# Altium PCB PCB_FinalVersion.PcbDoc
Units mm, origin at the board's own origin, x right, y up, seen from the top; angles counter-clockwise.
Board outline 269.9 x 119.9 mm, 2 copper layers (Top Layer, Bottom Layer); 58 components, 78 nets, 213 pads, 10 vias.
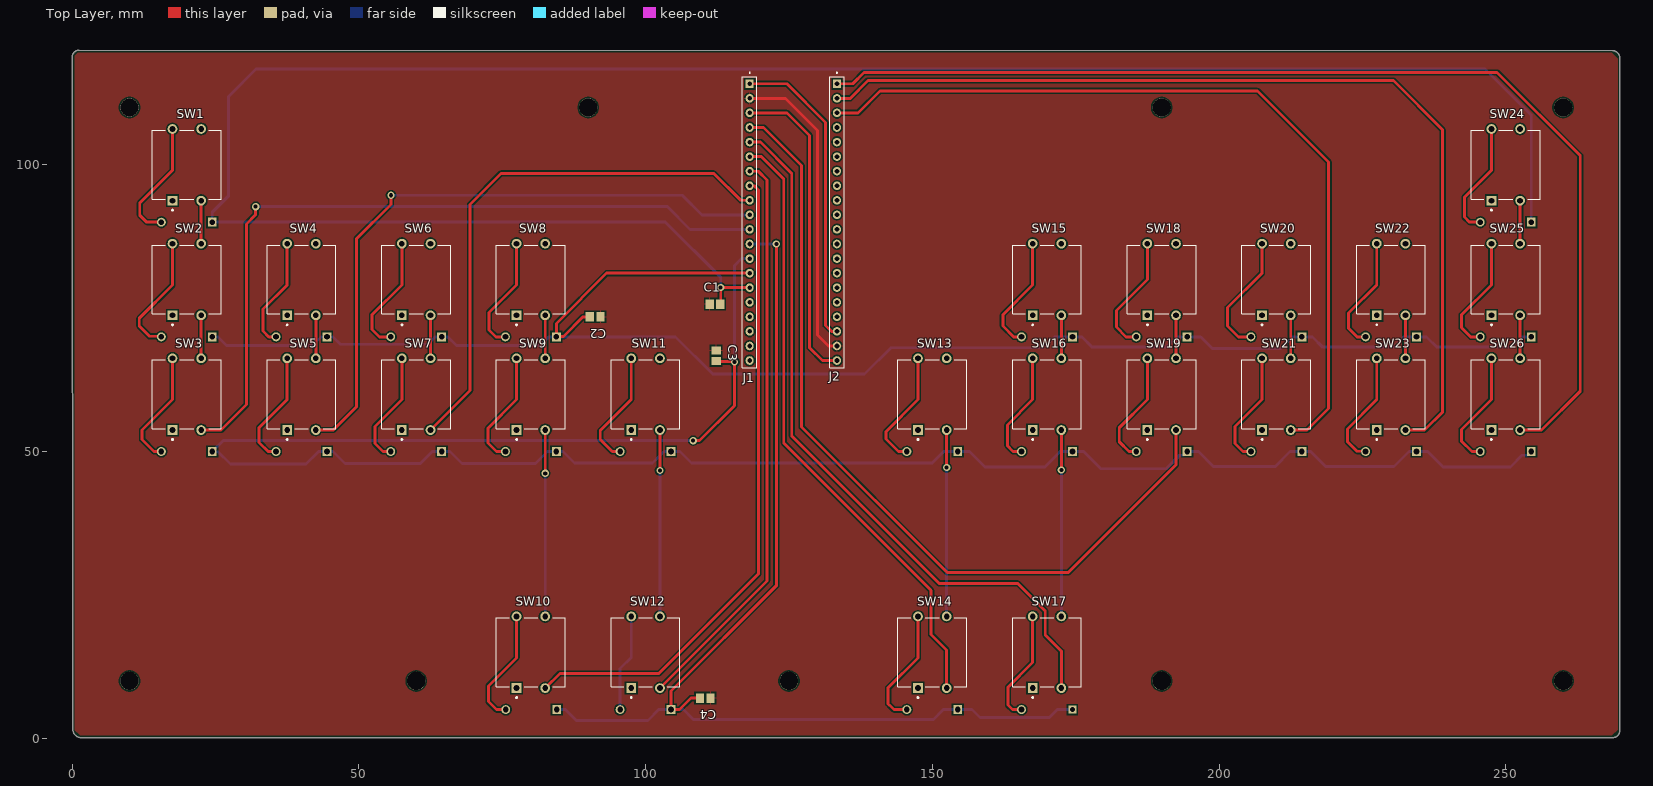
[diagram p0: Top Layer view]
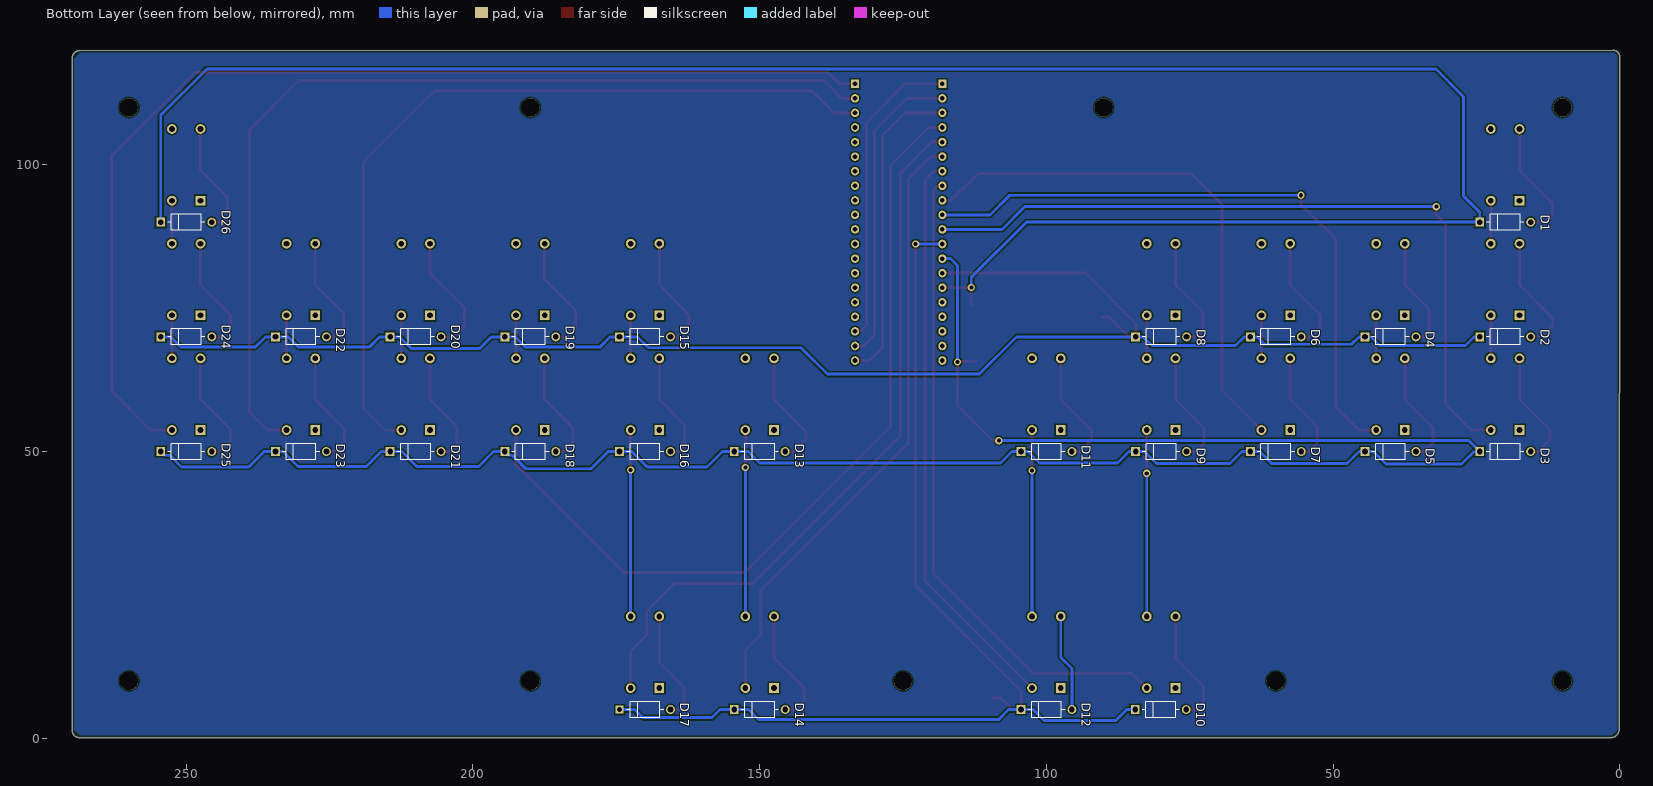
[diagram p1: Bottom Layer view, seen from below]
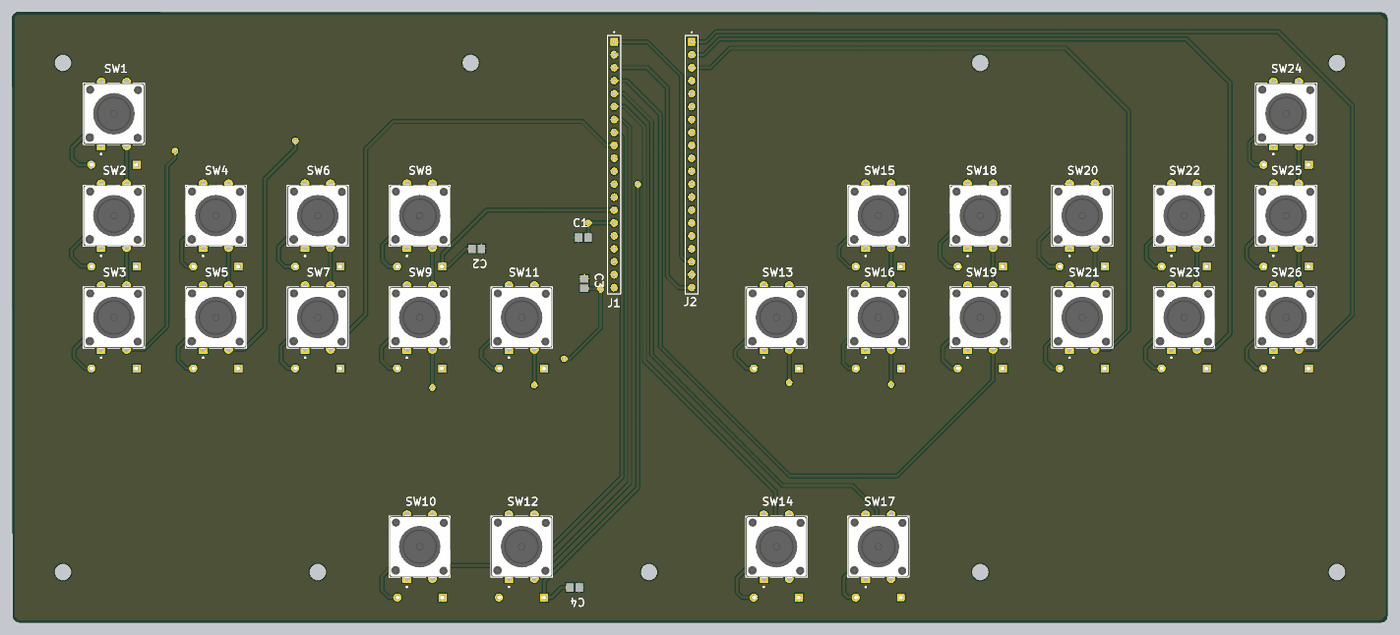
[diagram p2: 3D render of the assembled board from above, using the file's embedded part models]
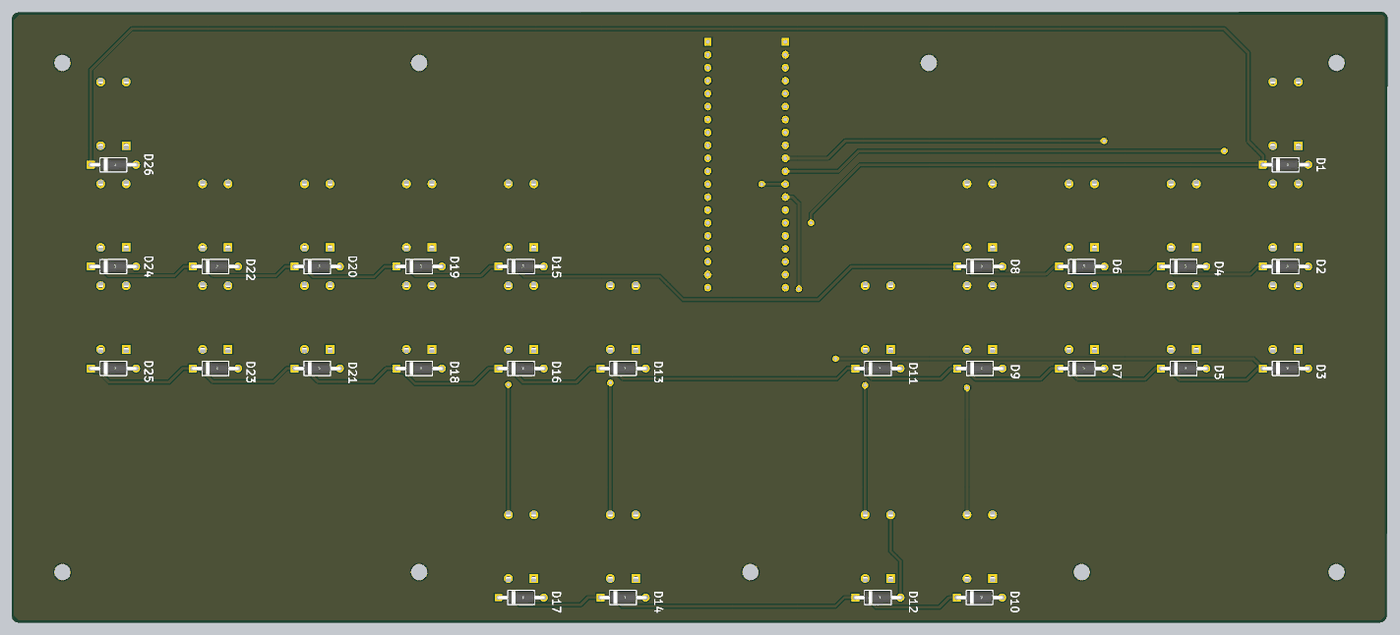
[diagram p3: 3D render of the assembled board from below, using the file's embedded part models]

## Layer stack, top to bottom
Top Solder: solder mask 0.0102, Solder Resist, Dk 3.5
Top Layer: signal copper 0.0356
Dielectric 1: dielectric 0.32, FR-4, Dk 4.8
Bottom Layer: signal copper 0.0356
Bottom Solder: solder mask 0.0102, Solder Resist, Dk 3.5

## Board outline
0.129,1.541 ccw(c1.57,1.541) 1.57,0.1 5,0.1 268.63,0.1 ccw(c268.63,1.37) 269.9,1.37 269.9,118.63 ccw(c268.63,118.63) 268.63,119.9 1.217,120 ccw(c1.217,118.783) 0,118.783

## Design rules (kind name [scope] priority, off if disabled: settings)
Clearance [All] p1: gap=0.254 ignorepadtopadclearanceinfootprint=FALSE except(0: Arc-Hole Track-Hole SMDPad-Hole THPad-Hole Via-Hole Fill-Hole Poly-Hole Region-Hole Text-Hole)
PolygonConnect [All] p1: connectstyle=Relief reliefconductorwidth=0.254 reliefentries=4 polygonreliefangle="90 Angle" airgapwidth=0.254
RoutingVias [All] p1: holewidth=0.711 width=1.27 viastyle="Through Hole" minholewidth=0.711 minwidth=1.27 maxholewidth=0.711 maxwidth=1.27
SolderMaskExpansion [All] p1: expansion=0.102 istentingtop=FALSE
Width [All] p1: maxlimit=0.5 minlimit=0.254 preferedwidth=0.3
30 further rules are at their usual default settings.

## Classes and differential pairs
component class Sheet1: * A B C1 C2 C3 C4 D D1 D2 D3 D4 D5 D6 D7 D8 D9 D10 D11 D12 D13 D14 D15 D16 D17 D18 D19 D20 D21 D22 D23 D24 D25 D26 E F G H J1 J2 K L O P R S "Special 1" "Special 2" T U W Z

## Components (designator, comment, footprint, x,y, rotation, side; value= is the part's Value field where it differs from the comment)
C1 "TACR107M003XTA" CAPC2014X150X70ML20 112.1,75.7 r0 top
C2 "TACR107M003XTA" CAPC2014X150X70ML20 91.2,73.5 r180 top
C3 "TACR107M003XTA" CAPC2014X150X70ML20 112.3,66.7 r270 top
C4 "TACR107M003XTA" CAPC2014X150X70ML20 110.4,7 r180 top
D1 "1N4007" FP-1N4007-MFG#1 20,90 r180 bottom value=15pF
D2 "1N4007" FP-1N4007-MFG#1 20,70 r180 bottom value=15pF
D3 "1N4007" FP-1N4007-MFG#1 20,50 r180 bottom value=15pF
D4 "1N4007" FP-1N4007-MFG#1 40,70 r180 bottom value=15pF
D5 "1N4007" FP-1N4007-MFG#1 40,50 r180 bottom value=15pF
D6 "1N4007" FP-1N4007-MFG#1 60,70 r180 bottom value=15pF
D7 "1N4007" FP-1N4007-MFG#1 60,50 r180 bottom value=15pF
D8 "1N4007" FP-1N4007-MFG#1 80,70 r180 bottom value=15pF
D9 "1N4007" FP-1N4007-MFG#1 80,50 r180 bottom value=15pF
D10 "1N4007" FP-1N4007-MFG#1 80.061,5 r180 bottom value=15pF
D11 "1N4007" FP-1N4007-MFG#1 100,50 r180 bottom value=15pF
D12 "1N4007" FP-1N4007-MFG#1 100,5 r180 bottom value=15pF
D13 "1N4007" FP-1N4007-MFG#1 150,50 r180 bottom value=15pF
D14 "1N4007" FP-1N4007-MFG#1 150,5 r180 bottom value=15pF
D15 "1N4007" FP-1N4007-MFG#1 170,70 r180 bottom value=15pF
D16 "1N4007" FP-1N4007-MFG#1 170,50 r180 bottom value=15pF
D17 "1N4007" FP-1N4007-MFG#2 170,5 r180 bottom value=15pF
D18 "1N4007" FP-1N4007-MFG#1 190,50 r180 bottom value=15pF
D19 "1N4007" FP-1N4007-MFG#1 190,70 r180 bottom value=15pF
D20 "1N4007" FP-1N4007-MFG#1 210,70 r180 bottom value=15pF
D21 "1N4007" FP-1N4007-MFG#1 210,50 r180 bottom value=15pF
D22 "1N4007" FP-1N4007-MFG#1 230,70 r180 bottom value=15pF
D23 "1N4007" FP-1N4007-MFG#1 230,50 r180 bottom value=15pF
D24 "1N4007" FP-1N4007-MFG#1 250,70 r180 bottom value=15pF
D25 "1N4007" FP-1N4007-MFG#1 250,50 r180 bottom value=15pF
D26 "1N4007" FP-1N4007-MFG#1 250,90 r180 bottom value=15pF
J1 "TS-120-T-AA" SAMTEC_TS-120-T-AA 118.156,90 r270 top
J2 "TS-120-T-AA" SAMTEC_TS-120-T-AA 133.376,90 r270 top
SW1 "MJTP1212A" FP-MJTP1212A-MFG 20,100 r90 top
SW2 "MJTP1212A" FP-MJTP1212A-MFG 20,80 r90 top
SW3 "MJTP1212A" FP-MJTP1212A-MFG 20,60 r90 top
SW4 "MJTP1212A" FP-MJTP1212A-MFG 40,80 r90 top
SW5 "MJTP1212A" FP-MJTP1212A-MFG 40,60 r90 top
SW6 "MJTP1212A" FP-MJTP1212A-MFG 60,80 r90 top
SW7 "MJTP1212A" FP-MJTP1212A-MFG 60,60 r90 top
SW8 "MJTP1212A" FP-MJTP1212A-MFG 80,80 r90 top
SW9 "MJTP1212A" FP-MJTP1212A-MFG 80,60 r90 top
SW10 "MJTP1212A" FP-MJTP1212A-MFG 80,15 r90 top
SW11 "MJTP1212A" FP-MJTP1212A-MFG 100,60 r90 top
SW12 "MJTP1212A" FP-MJTP1212A-MFG 100,15 r90 top
SW13 "MJTP1212A" FP-MJTP1212A-MFG 150,60 r90 top
SW14 "MJTP1212A" FP-MJTP1212A-MFG 150,15 r90 top
SW15 "MJTP1212A" FP-MJTP1212A-MFG 170,80 r90 top
SW16 "MJTP1212A" FP-MJTP1212A-MFG 170,60 r90 top
SW17 "MJTP1212A" FP-MJTP1212A-MFG 170,15 r90 top
SW18 "MJTP1212A" FP-MJTP1212A-MFG 190,80 r90 top
SW19 "MJTP1212A" FP-MJTP1212A-MFG 190,60 r90 top
SW20 "MJTP1212A" FP-MJTP1212A-MFG 210,80 r90 top
SW21 "MJTP1212A" FP-MJTP1212A-MFG 210,60 r90 top
SW22 "MJTP1212A" FP-MJTP1212A-MFG 230,80 r90 top
SW23 "MJTP1212A" FP-MJTP1212A-MFG 230,60 r90 top
SW24 "MJTP1212A" FP-MJTP1212A-MFG 250,100 r90 top
SW25 "MJTP1212A" FP-MJTP1212A-MFG 250,80 r90 top
SW26 "MJTP1212A" FP-MJTP1212A-MFG 250,60 r90 top

## Footprints (in the part's own frame and the unit in brackets; to place one, negate y for a bottom-side part, rotate by r counter-clockwise, add the part's x,y. Pads: shape width x height; smd on the part's side, far side on the other; paste and mask are expansions set on the pad)
CAPC2014X150X70ML20 [mm] "Chip Capacitor, 2-Leads, Body 2.00x1.35mm, IPC Low Density"
  rect 1.45x1.65 smd: 1(-0.925,0) 2(0.925,0)
  body extent -1.1,-0.77 1.1,0.77, height 1.5
FP-1N4007-MFG#1 [mm]
  rect 1.55x1.55 hole 1 paste-2539.97 mask+0: 1(-4.44,0)
  round 1.55 hole 1 paste-2539.97 mask+0: 2(4.44,0)
  silkscreen extent -3.27,-1.4 3.27,1.4, body extent -4.83,-1.29 4.83,1.29, height 2.6
FP-1N4007-MFG#2 [mm]
  rect 1.4x1.4 hole 0.9 paste-2539.97 mask+0: 1(-4.44,0)
  round 1.55 hole 1 paste-2539.97 mask+0: 2(4.44,0)
  silkscreen extent -3.27,-1.4 3.27,1.4, body extent -4.83,-1.29 4.83,1.29, height 2.6
FP-MJTP1212A-MFG [mm]
  rect 1.7x1.7 hole 1 paste-2539.97 mask+0: 1(-6.25,2.5)
  round 1.7 hole 1 paste-2539.97 mask+0: 2(6.25,2.5) 3(-6.25,-2.5) 4(6.25,-2.5)
  silkscreen extent -8.02,-6 6,6, body extent -7.27,-6.1 7.27,6.1, height 0.25
SAMTEC_TS-120-T-AA [mm]
  rect 1.5x1.4 hole 0.8: 01(-24.13,0)
  oval 1.5x1.4 hole 0.8: 02(-21.59,0) 03(-19.05,0) 04(-16.51,0) 05(-13.97,0) 06(-11.43,0) 07(-8.89,0) 08(-6.35,0) 09(-3.81,0) 10(-1.27,0) 11(1.27,0) 12(3.81,0) 13(6.35,0) 14(8.89,0) 15(11.43,0) 16(13.97,0) 17(16.51,0) 18(19.05,0) 19(21.59,0) 20(24.13,0)
  silkscreen extent -26.15,-1.27 25.4,1.27

## Part data
C1 C2 C3 C4: library part CMP-2007-00028-1, Manufacturer="AVX Interconnect / Elco", Part Number=TACR107M003XTA
D1 D2 D3 D4 D5 D6 D7 D8 D9 D10 D11 D12 D13 D14 D15 D16 D17 D18 D19 D20 D21 D22 D23 D24 D25 D26: library part CMP-123542-000001-1, "Rectifier diode 1000 V 1 A DO-41, ,", Capacitance=15pF, Forward Current=1A, Manufacturer=Diotec, Max Junction Temp=+175°C, Max Repetitive Reverse Voltage=1000V, Max Surge Forward Current=27A, Peak Reverse Current=5uA, Temperature="-50°C to +175°C", Temperature Range Low=-50°C, Automotive=No, Category=Diode, ComponentLink2Description=Datasheet, ComponentLink2URL=https://datasheet.octopart.com/1N4007-Diotec-datasheet-62346875.pdf, Device Class L1="Discrete Semiconductors", Device Class L2=Diodes, Device Class L3="Rectifier Diodes", Height=2.8mm, Ipc Land Pattern Name=DIOAD888W100L520D280, Lead Free=Yes, Manufacturer Part Number=1N4007, Octopart=https://octopart.com/1n4007-diotec-4040411, Package=1N4007, Reverse Voltage=1000V, RoHS=TRUE, Temperature Range High=+175°C
J1 J2: "Headers & Wire Housings .100 Single Row Screw Machine Terminal Strip", Package=None, Availability="In Stock", Check_prices=https://www.snapeda.com/parts/TS-120-T-AA/Samtec/view-part/?ref=eda, MF=Samtec, MP=TS-120-T-AA, Price=None, Purchase-URL=https://pricing.snapeda.com/search?q=TS-120-T-AA&ref=eda, SnapEDA_Link=https://www.snapeda.com/parts/TS-120-T-AA/Samtec/view-part/?ref=snap
SW1 SW2 SW3 SW4 SW5 SW6 SW7 SW8 SW9 SW10 SW11 SW12 SW13 SW14 SW15 SW16 SW17 SW18 SW19 SW20 SW21 SW22 SW23 SW24 SW25 SW26: library part CMP-47024-000003-1, "SWITCH TACTILE SPST-NO 0.05A 12V", Contact Resistance=100mR, Current Rating=50mA, Max Operating Temperature=70°C, Max Voltage Rating (DC)=12V, Min Operating Temperature=-20°C, Operating Force=160gf, Package Quantity=100, Actuator Length=3.5mm, Actuator Material=Polyoxymethylene, Actuator Type=Standard, Contact Material=Bronze, Contact Plating=Silver, Electrical Life=100000Cycles, Illumination Type=Non-Illuminated, Mechanical Life=100000Cycles, Mount="Through Hole", Orientation=Straight, Packaging=Bulk, REACH SVHC="No SVHC", Switch Function=Off-Mom, Switch Travel=0.3mm, Termination="PC Pin", Throw Configuration=SPST, Voltage Rating (DC)=12V

## Free pads (board coordinates)
  round 3.2 hole 3.2: 4(10,10) 4(10,110) 4(60,10) 4(90,110) 4(125,10) 4(190,10) 4(190,110) 4(260,10) 4(260,110)

## Via types
v1: diameter 1.27, hole 0.711, Top Layer to Bottom Layer, 10 vias

## Nets (pads, with @x,y where several pads share a name; then routed paths per layer and width w, separated by ;. In a path a pad name is that pad's centre, name@x,y a point inside that pad or via, vN(x,y) a via of type N, cw(c..) or ccw(c..) an arc to the next point about the centre after c; other vN are vias at no path point)
3.3V: J1.03 J2.20 | length 54.8
  Top Layer w0.5: J1.03 124.65,109.05 128.6,105.1 128.6,68.1 130.83,65.87 J2.20
5V: J1.01 J2.18 | length 53.8
  Top Layer w0.5: J1.01 124.67,114.13 131.4,107.4 131.4,72 132.45,70.95 J2.18
A8: J2.05
A9: J2.06
A10: J2.07
A11: J2.08
A12: J2.09
A15: J2.10
B3: J2.11
B4: J2.12
B5: J2.13
B6: J2.14
B7: J2.15
B8: J2.16
B9: J2.17
B15: J2.04
C13: J1.19
C14: J1.18
C15: J1.17
Column1: J1.11 SW3.3 | length 132.7
  Top Layer w0.5: SW3.3 25.95,53.75 30.4,58.2 30.4,89.7 32,91.3 v1(32,92.7)
  Bottom Layer w0.5: v1(32,92.7) 103.8,92.7 107.77,88.73 J1.11
Column2: J1.10 SW5.3 | length 112.1
  Top Layer w0.5: SW5.3 45.55,53.75 49.6,57.8 49.6,87.1 55.6,93.1 v1(55.6,94.7)
  Bottom Layer w0.5: v1(55.6,94.7) 106.4,94.7 109.83,91.27 J1.10
Column3: J1.09 SW7.3 | length 95.1
  Top Layer w0.5: SW7.3 69.4,60.65 69.4,93.1 74.8,98.5 111.9,98.5 116.59,93.81 J1.09
Column4: J1.08 SW10.3 | length 114.2
  Top Layer w0.5: SW10.3 85.05,11.3 102.3,11.3 119.7,28.7 119.7,95.6 118.95,96.35 J1.08
Column5: J1.07 SW12.3 | length 100
  Top Layer w0.5: SW12.3 121.2,27.45 121.2,97.33 119.64,98.89 J1.07
Column6: J1.06 SW14.3 | length 108.1
  Top Layer w0.5: J1.06 120.17,101.43 124.1,97.5 124.1,51.5 149.8,25.8 149.8,18.091 152.5,15.391 SW14.3
Column7: J1.05 SW17.3 | length 126.9
  Top Layer w0.5: J1.05 120.03,103.97 125.5,98.5 125.5,52.7 151.2,27 164.9,27 169.7,22.2 169.7,18 172.5,15.2 SW17.3
Column8: J1.04 SW19.3 | length 147
  Top Layer w0.5: J1.04 120.59,106.51 127.2,99.9 127.2,54.3 152.6,28.9 173.7,28.9 192.5,47.7 SW19.3
Column9: J2.03 SW21.3 | length 143.6
  Top Layer w0.5: J2.03 137.05,109.05 140.9,112.9 206.7,112.9 219.1,100.5 219.1,57.5 215.35,53.75 SW21.3
Column10: J2.02 SW23.3 | length 167.5
  Top Layer w0.5: J2.02 135.69,111.59 138.8,114.7 230.4,114.7 239,106.1 239,56.9 235.85,53.75 SW23.3
Column11: J2.01 SW26.3 | length 190.8
  Top Layer w0.5: J2.01 136.13,114.13 138.1,116.1 248.5,116.1 263,101.6 263,60.5 256.25,53.75 SW26.3
GND: C1.1 C2.1 C3.1 C4.1 J1.02 J2.19 | length 54
  Top Layer w0.5: J1.02 124.41,111.59 130,106 130,70.3 131.89,68.41 J2.19
NetD1_2: D1.2 SW1.2 | length 21.7
  Top Layer w0.5: D1.2 13,90 11.8,91.2 11.8,93.354 17.5,99.054 SW1.2
NetD2_2: D2.2 SW2.2 | length 21.4
  Top Layer w0.5: D2.2 15.462,70.098 13.502,70.098 11.7,71.9 11.7,73.254 17.5,79.054 SW2.2
NetD3_2: D3.2 SW3.2 | length 20.6
  Top Layer w0.5: D3.2 14.3,50 12.2,52.1 12.2,53.754 17.5,59.054 SW3.2
NetD4_2: D4.2 SW4.2 | length 19.7
  Top Layer w0.5: D4.2 34.3,70 33.3,71 33.3,74.854 37.5,79.054 SW4.2
NetD5_2: D5.2 SW5.2 | length 20.3
  Top Layer w0.5: D5.2 34.2,50 32.6,51.6 32.6,54.154 37.5,59.054 SW5.2
NetD6_2: D6.2 SW6.2 | length 20.9
  Top Layer w0.5: D6.2 53.6,70 52.3,71.3 52.3,73.854 57.5,79.054 SW6.2
NetD7_2: D7.2 SW7.2 | length 20.1
  Top Layer w0.5: D7.2 54.2,50 52.8,51.4 52.8,54.354 57.5,59.054 SW7.2
NetD8_2: D8.2 SW8.2 | length 20.4
  Top Layer w0.5: D8.2 73.9,70 72.7,71.2 72.7,74.254 77.5,79.054 SW8.2
NetD9_2: D9.2 SW9.2 | length 20.5
  Top Layer w0.5: D9.2 74,50 72.5,51.5 72.5,54.054 77.5,59.054 SW9.2
NetD10_2: D10.2 SW10.2 | length 20.5
  Top Layer w0.5: D10.2 74,5 72.6,6.4 72.6,9.124 77.5,14.024 SW10.2
NetD11_2: D11.2 SW11.2 | length 20.7
  Top Layer w0.5: D11.2 94.2,50 92.1,52.1 92.1,53.654 97.5,59.054 SW11.2
NetD12_2: D12.2 SW12.2 | length 17.1
  Bottom Layer w0.5: D12.2 95.56,12.16 97.5,14.1 SW12.2
NetD13_2: D13.2 SW13.2 | length 20.9
  Top Layer w0.5: D13.2 144.1,50 141.9,52.2 141.9,53.454 147.5,59.054 SW13.2
NetD14_2: D14.2 SW14.2 | length 21.1
  Top Layer w0.5: D14.2 143.3,5 142.6,5.7 142.593,5.7 142.3,5.993 142.3,8.8 147.5,14 SW14.2
NetD15_2: D15.2 SW15.2 | length 20.6
  Top Layer w0.5: D15.2 164.2,70 162.3,71.9 162.3,73.854 167.5,79.054 SW15.2
NetD16_2: D16.2 SW16.2 | length 19.9
  Top Layer w0.5: D16.2 164.1,50 163.1,51 163.1,54.654 167.5,59.054 SW16.2
NetD17_2: D17.2 SW17.2 | length 19.9
  Top Layer w0.5: D17.2 164,5 163.2,5.8 163.2,8.9 167.5,13.2 SW17.2
NetD18_2: D18.2 SW19.2 | length 20.2
  Top Layer w0.5: D18.2 184.3,50 182.6,51.7 182.6,54.154 187.5,59.054 SW19.2
NetD19_2: D19.2 SW18.2 | length 21
  Top Layer w0.5: D19.2 183.8,70 182.1,71.7 182.1,74.6 187.5,80 SW18.2
NetD20_2: D20.2 SW20.2 | length 21.7
  Top Layer w0.5: D20.2 203.4,70 201.5,71.9 201.5,75.1 207.5,81.1 SW20.2
NetD21_2: D21.2 SW21.2 | length 20.1
  Top Layer w0.5: D21.2 204.2,50 202.8,51.4 202.8,54.354 207.5,59.054 SW21.2
NetD22_2: D22.2 SW22.2 | length 20.4
  Top Layer w0.5: D22.2 224.1,70 222.6,71.5 222.6,74.154 227.5,79.054 SW22.2
NetD23_2: D23.2 SW23.2 | length 20.5
  Top Layer w0.5: D23.2 225.512,50.048 224.052,50.048 222.4,51.7 222.4,53.954 227.5,59.054 SW23.2
NetD24_2: D24.2 SW25.2 | length 20.7
  Top Layer w0.5: D24.2 243.9,70 242.3,71.6 242.3,73.854 247.5,79.054 SW25.2
NetD25_2: D25.2 SW26.2 | length 20.6
  Top Layer w0.5: D25.2 244.1,50 242.3,51.8 242.3,53.854 247.5,59.054 SW26.2
NetD26_2: D26.2 SW24.2 | length 20.4
  Top Layer w0.5: D26.2 243.7,90 242.8,90.9 242.8,94.354 247.5,99.054 SW24.2
NetSW1_3: SW1.3 SW2.4 | length 7.5
  Top Layer w0.5: SW2.4 SW1.3
NetSW2_3: SW2.3 SW3.4 | length 7.5
  Top Layer w0.5: SW3.4 SW2.3
NetSW4_3: SW4.3 SW5.4 | length 7.5
  Top Layer w0.5: SW5.4 SW4.3
NetSW6_3: SW6.3 SW7.4 | length 7.5
  Top Layer w0.5: SW7.4 SW6.3
NetSW8_3: SW8.3 SW9.4 | length 7.5
  Top Layer w0.5: SW9.4 SW8.3
NetSW9_3: SW9.3 SW10.4 | length 32.5
  Top Layer w0.5: v1(82.5,46.2) SW9.3
  Bottom Layer w0.5: SW10.4 v1(82.5,46.2)
NetSW11_3: SW11.3 SW12.4 | length 32.5
  Top Layer w0.5: v1(102.5,46.7) SW11.3
  Bottom Layer w0.5: SW12.4 v1(102.5,46.7)
NetSW13_3: SW13.3 SW14.4 | length 32.5
  Top Layer w0.5: v1(152.5,47.2) SW13.3
  Bottom Layer w0.5: SW14.4 v1(152.5,47.2)
NetSW15_3: SW15.3 SW16.4 | length 7.5
  Top Layer w0.5: SW16.4 SW15.3
NetSW16_3: SW16.3 SW17.4 | length 32.5
  Top Layer w0.5: v1(172.5,46.8) SW16.3
  Bottom Layer w0.5: SW17.4 v1(172.5,46.8)
NetSW18_3: SW18.3 SW19.4 | length 7.5
  Top Layer w0.5: SW19.4 SW18.3
NetSW20_3: SW20.3 SW21.4 | length 7.5
  Top Layer w0.5: SW21.4 SW20.3
NetSW22_3: SW22.3 SW23.4 | length 7.5
  Top Layer w0.5: SW23.4 SW22.3
NetSW24_3: SW24.3 SW25.4 | length 7.5
  Top Layer w0.5: SW25.4 SW24.3
NetSW25_3: SW25.3 SW26.4 | length 7.5
  Top Layer w0.5: SW26.4 SW25.3
R: J1.16
Row1: C1.2 D1.1 D26.1 J1.15 | length 376.8
  Top Layer w0.5: C1.2@112.925,75.7 113.1,75.875 v1(113.1,78.6) 113.115,78.585 118.141,78.585 J1.15 ; D26.1 D26.1@254.53,90.09
  Bottom Layer w0.5: v1(113.1,78.6) 113.1,80.4 103.5,90 D1.1 24.44,91.74 27.3,94.6 27.3,111.928 32.072,116.7 246.4,116.7 254.44,108.66 D26.1
Row2: C2.2 D2.1 D4.1 D6.1 D8.1 D15.1 D19.1 D20.1 D22.1 D24.1 J1.14 | length 292.1
  Top Layer w0.5: C2.2 90.268,73.493 89.093,73.493 85.672,70.072 84.512,70.072 D8.1 84.44,72.34 93.21,81.11 J1.14
  Bottom Layer w0.5: D2.1 24.487,69.953 25.447,69.953 26.9,68.5 41.9,68.5 43.4,70 45.5,70 46.8,68.7 62,68.7 63.3,70 65.5,70 67,68.5 81.6,68.5 83.1,70 D8.1 105.2,70 111.7,63.5 138.2,63.5 142.8,68.1 169.4,68.1 171.3,70 D15.1 176.1,70 177.9,68.2 190.8,68.2 192.6,70 D19.1 196.8,70 198.8,68 210.8,68 212.8,70 D20.1 216.3,70 218.1,68.2 230.4,68.2 232.2,70 D22.1 236.2,70 238,68.2 250.9,68.2 252.7,70 D24.1
Row3: C3.2 D3.1 D5.1 D7.1 D9.1 D11.1 D13.1 D16.1 D18.1 D21.1 D23.1 D25.1 J1.13 | length 375.1
  Top Layer w0.5: D3.1@24.39,49.95 D3.1 ; v1(108.3,51.9) 109.4,51.9 115.5,58 v1(115.5,65.6) 115.412,65.688 112.488,65.688 C3.2@112.4,65.775
  Bottom Layer w0.5: v1(108.3,51.9) 26.34,51.9 D3.1 24.487,49.953 25.447,49.953 27.6,47.8 40.8,47.8 43,50 D5.1 45.5,50 47.6,47.9 60.7,47.9 62.8,50 D7.1 65.9,50 68,47.9 80.8,47.9 82.9,50 D9.1 85.6,50 87.6,48 101.2,48 103.2,50 D11.1 106,50 108,48 150,48 152,50 D13.1 156.5,50 159.2,47.3 169.6,47.3 172.3,50 D16.1 176.4,50 179.4,47 190.8,47 193.152,49.352 193.792,49.352 D18.1 196.4,50 199,47.4 209.8,47.4 212.4,50 D21.1 216,50 218.6,47.4 230.5,47.4 233.1,50 D23.1 236.4,50 239.1,47.3 250.8,47.3 252.852,49.352 253.792,49.352 D25.1 ; v1(115.5,65.6) 115.5,82.4 116.75,83.65 J1.13
Row4: C4.2 D10.1 D12.1 D14.1 D17.1 J1.12 | length 193.4
  Top Layer w0.5: C4.2 107.9,7 105.9,5 D12.1 104.44,8.24 122.8,26.6 v1(122.8,86.2)
  Bottom Layer w0.5: D10.1 86,5 87.9,3.1 100.4,3.1 102.3,5 D12.1 106.6,5 108.3,3.3 150.2,3.3 151.9,5 D14.1 156.9,5 158.3,3.6 170.4,3.6 171.8,5 D17.1 ; J1.12 118.161,86.195 122.795,86.195 v1(122.8,86.2)
VB: J1.20
pads on no net: SW1.1 SW1.4 SW2.1 SW3.1 SW4.1 SW4.4 SW5.1 SW6.1 SW6.4 SW7.1 SW8.1 SW8.4 SW9.1 SW10.1 SW11.1 SW11.4 SW12.1 SW13.1 SW13.4 SW14.1 SW15.1 SW15.4 SW16.1 SW17.1 SW18.1 SW18.4 SW19.1 SW20.1 SW20.4 SW21.1 SW22.1 SW22.4 SW23.1 SW24.1 SW24.4 SW25.1 SW26.1

## Polygon pours and split planes (outlines as drawn)
GND on Bottom Layer "GND_L02_P001" (solid, pour order 1): 1,119.5 0.5,119 0.5,1.4 1.4,0.5 268.5,0.5 269.5,1.5 269.5,118.5 268.5,119.5
GND on Top Layer "GND_L01_P000" (solid, pour order 0): 1,119.5 0.5,119 0.5,1.4 1.4,0.5 268.5,0.5 269.5,1.5 269.5,118.5 268.5,119.5

## Silkscreen, mask and mechanical layers (free items; w line width, h text height)
Mechanical 1:
  lines w0.254: 5,0.1 5.2,0.1 268.63,0.1 ccw(c268.63,1.37) 269.9,1.37 269.9,1.7 269.9,118.63 ccw(c268.63,118.63) 268.63,119.9 1.217,120 ccw(c1.217,118.783) 0,118.783 0.129,1.541 ccw(c1.57,1.541) 1.57,0.1 5,0.1 ; 5,0.1 5,0.1